# Altium PCB BG0250TG.PcbDoc
Units mil, origin at the board's own origin, x right, y up, seen from the top; angles counter-clockwise.
Board outline 984.25 x 939.45 mil, 4 copper layers (Top Layer, MidLayer 1, MidLayer 2, Bottom Layer), stack 61.723 mil thick; 48 components, 24 nets, 124 pads, 65 vias.
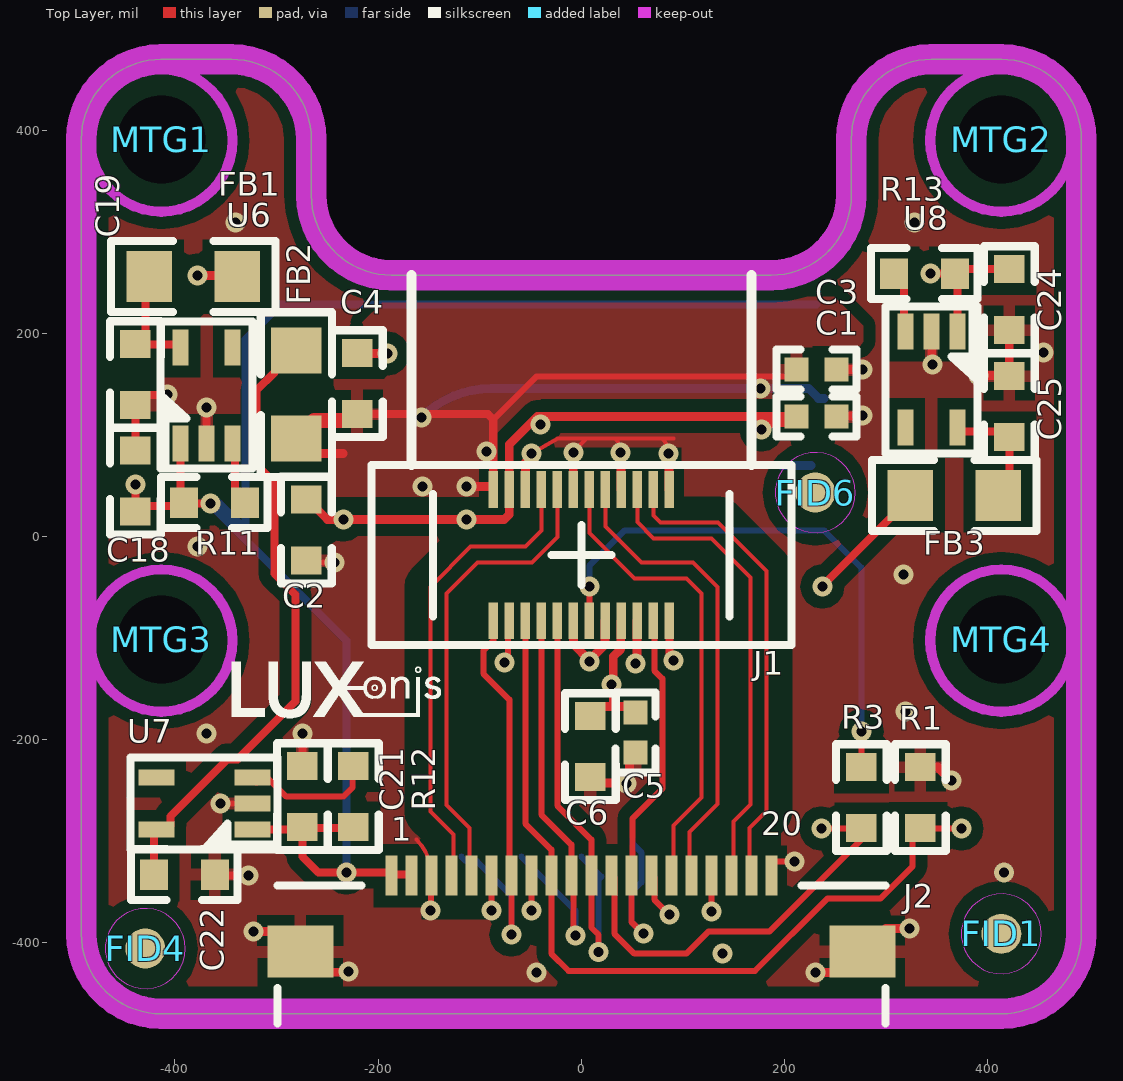
[diagram p0: Top Layer view]
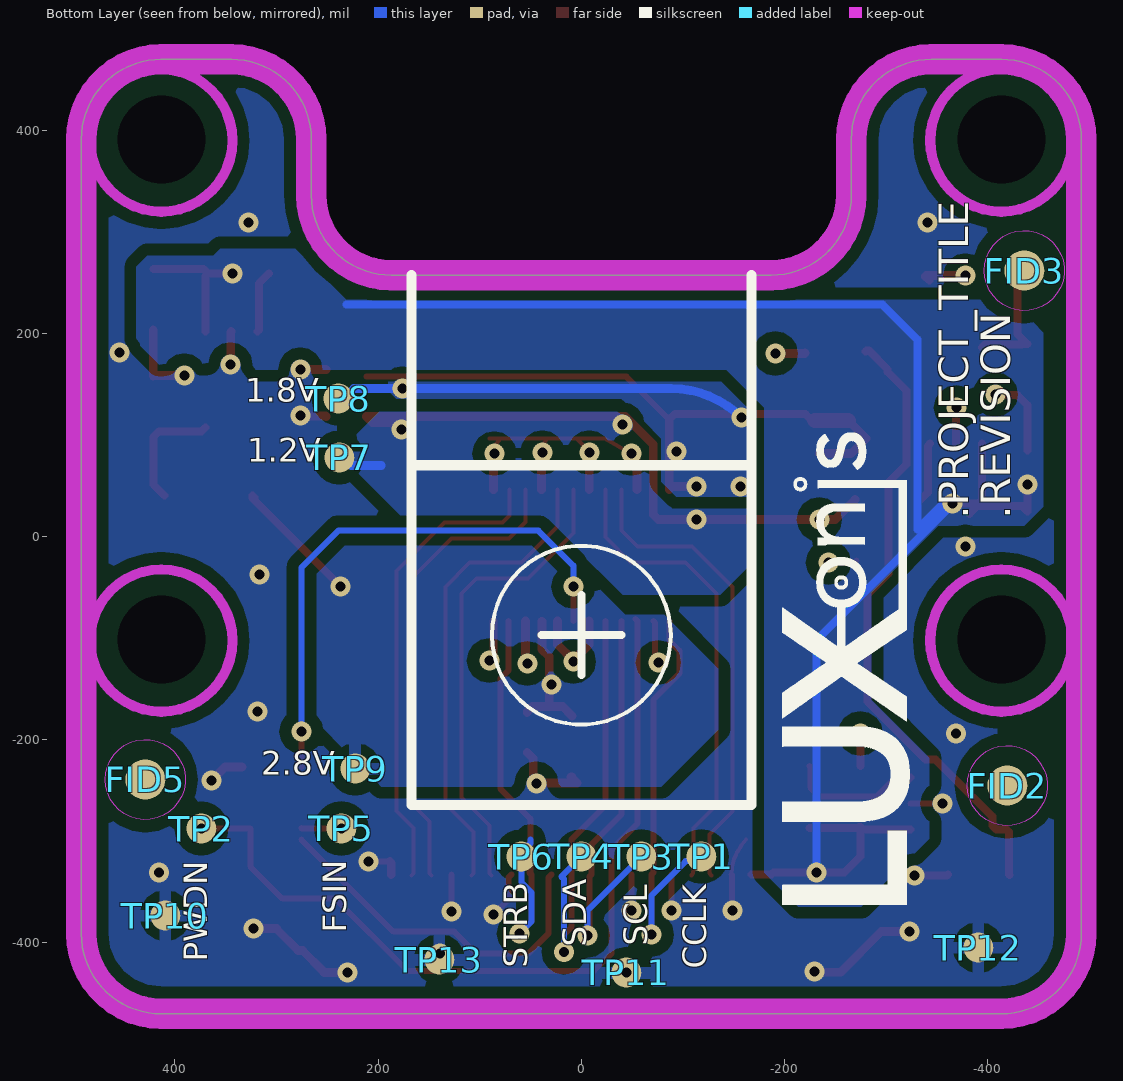
[diagram p1: Bottom Layer view, seen from below]
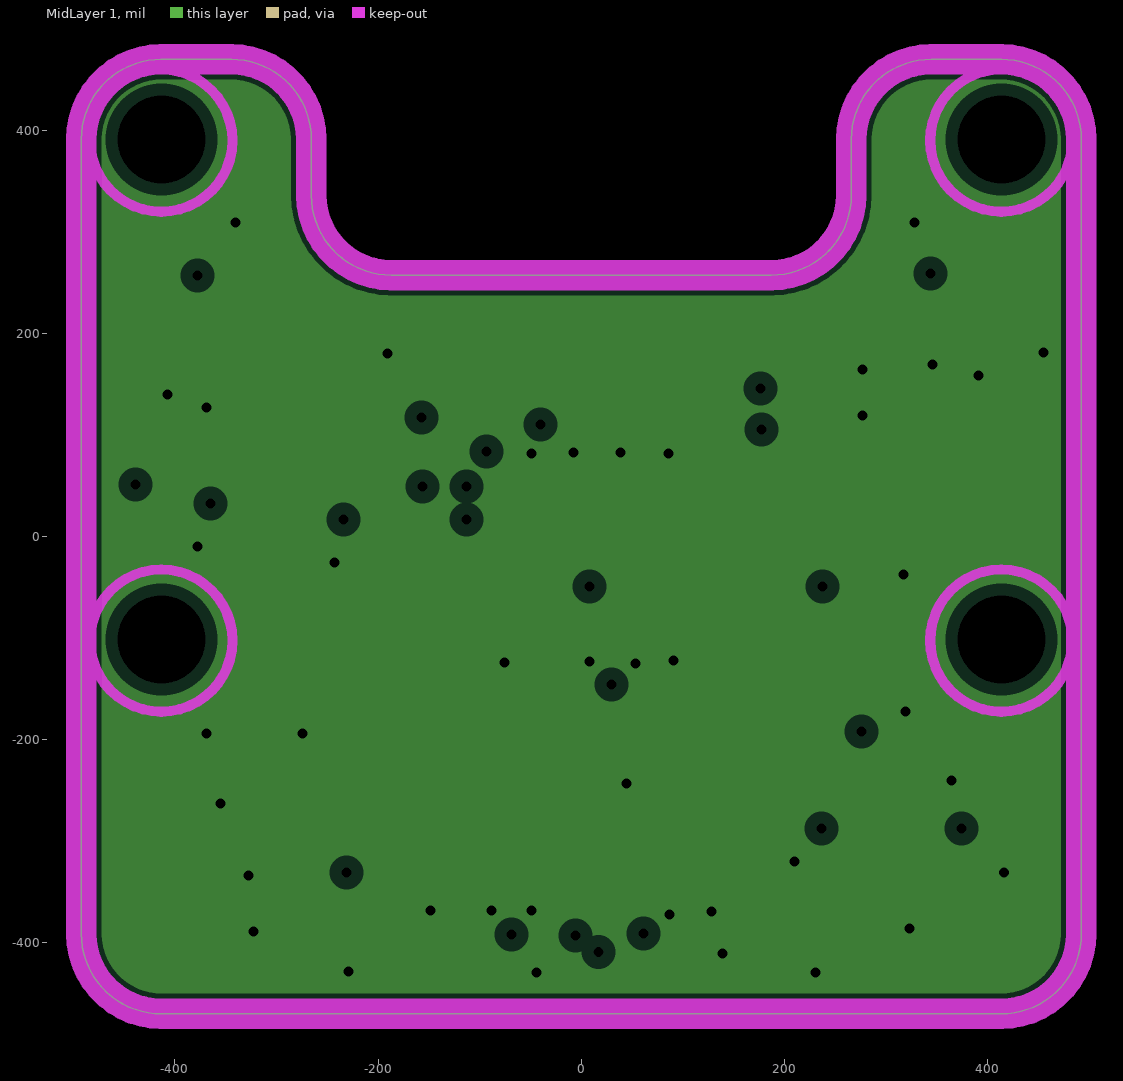
[diagram p2: MidLayer 1, clearances drawn from the general rule]
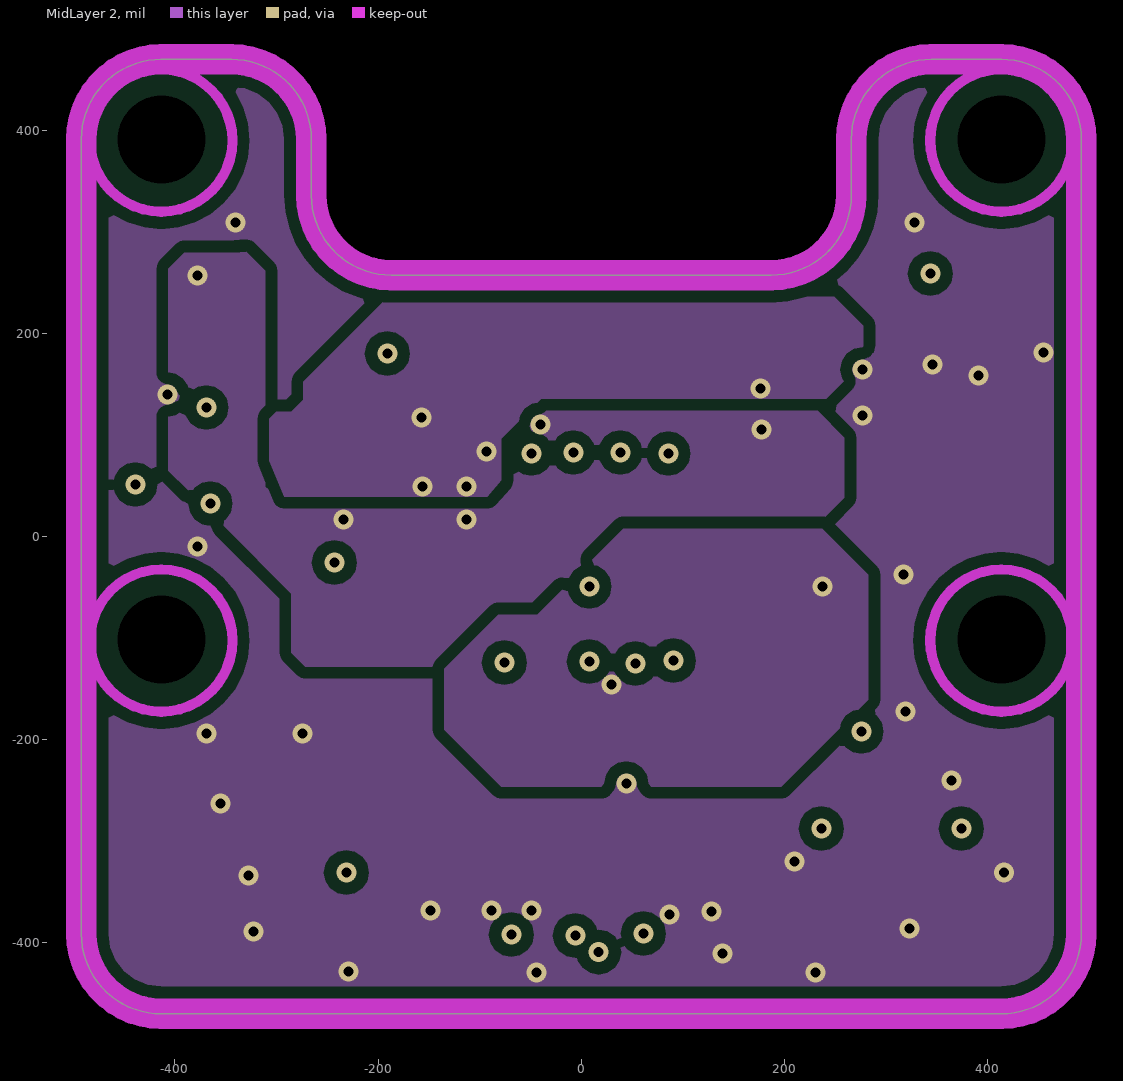
[diagram p3: MidLayer 2]

## Layer stack, top to bottom
Top Solder: solder mask 0.7874, Solder Resist, Dk 3.5
Top Layer: signal copper 1.3778
Dielectric1: prepreg 3.189, FR-4, Dk 4.3
MidLayer 1: plane copper 0.7, net GND
Dielectric3: core 51.1811, FR-4, Dk 4.3
MidLayer 2: signal copper 0.7087
Dielectric2: prepreg 3.189, FR-4, Dk 4.3
Bottom Layer: signal copper 1.3778
Bottom Solder: solder mask 0.7874, Solder Resist, Dk 3.5

## Board outline
-492.13,-390.98 ccw(c-413.39,-390.98) -413.39,-469.72 -413.39,-469.73 413.39,-469.73 413.39,-469.72 ccw(c413.39,-390.98) 492.13,-390.98 492.13,390.75 492.13,390.98 ccw(c413.39,390.98) 413.39,469.72 344.31,469.72 344.49,469.73 ccw(c344.49,390.98) 265.75,390.98 265.75,336.02 cw(c187.01,336.02) 187.01,257.28 -187.01,257.28 cw(c-187.01,336.02) -265.75,336.02 -265.75,390.98 ccw(c-344.49,390.98) -344.49,469.73 -344.31,469.72 -413.39,469.72 ccw(c-413.39,390.98) -492.13,390.98

## Design rules (kind name [scope] priority, off if disabled: settings)
AssemblyTestPointUsage [All] p1 off:
AssemblyTestpoint [All] p1 off: testpointundercomponent=TRUE minsize=40 maxsize=100 preferedsize=60 minholesize=0 maxholesize=40 preferedholesize=32 testpointgrid=1 usegrid=TRUE gridtolerance=0.01 allowsidetop=TRUE allowsidebottom=TRUE
Clearance Clearance_2 [InPolygon vs InNetClass('SENSOR1MIPI')] p1: gap=23.62 ignorepadtopadclearanceinfootprint=FALSE except(0: Arc-Hole Track-Hole SMDPad-Hole THPad-Hole Via-Hole Fill-Hole Poly-Hole Region-Hole Text-Hole; 7.87: Arc-Via Track-Via SMDPad-Via THPad-Via Via-Via Via-Fill Via-Poly Via-Region Via-Text)
Clearance Clearance_3 [InNamedPolygon('GND_L04_P018')] p2: gap=15.75 ignorepadtopadclearanceinfootprint=FALSE except(0: Arc-Hole Track-Hole SMDPad-Hole THPad-Hole Via-Hole Fill-Hole Poly-Hole Region-Hole Text-Hole)
Clearance Clearance_1 [InPolygon] p3: gap=11.81 ignorepadtopadclearanceinfootprint=FALSE except(0: Arc-Hole Track-Hole SMDPad-Hole THPad-Hole Via-Hole Fill-Hole Poly-Hole Region-Hole Text-Hole)
Clearance [All] p4: gap=3.94 ignorepadtopadclearanceinfootprint=FALSE except(0: Arc-Hole Track-Hole SMDPad-Hole THPad-Hole Via-Hole Fill-Hole Poly-Hole Region-Hole Text-Hole)
ComponentClearance [All] p1 off: gap=10 collisioncheckmode=3 verticalgap=10 showdistances=FALSE
DiffPairsRouting DiffPair_MIPI_1_DiffPairsRouting [InDifferentialPairClass('1MIPI')] p1: maxlimit=15.75 minlimit=10 mostfreqgap=11.81 toplayer_mingap=11.81 toplayer_minwidth=3.94 toplayer_maxwidth=3.94 toplayer_prefwidth=3.94 bottomlayer_mingap=11.81 bottomlayer_minwidth=3.94 bottomlayer_maxwidth=3.94 bottomlayer_prefwidth=3.94 impedanceprofiledriven=TRUE impedanceprofileid={84B90D63-6C53-4755-9BB4-0970869BF656} impedanceprofilevalue=100.000000 maxuncoupledlength=500
DiffPairsRouting DiffPair_MIPI_2_DiffPairsRouting [InDifferentialPairClass('2MIPI')] p2: maxlimit=15.75 minlimit=10 mostfreqgap=11.81 toplayer_mingap=11.81 toplayer_minwidth=3.94 toplayer_maxwidth=3.94 toplayer_prefwidth=3.94 bottomlayer_mingap=11.81 bottomlayer_minwidth=3.94 bottomlayer_maxwidth=3.94 bottomlayer_prefwidth=3.94 impedanceprofiledriven=TRUE impedanceprofileid={84B90D63-6C53-4755-9BB4-0970869BF656} impedanceprofilevalue=100.000000 maxuncoupledlength=500
DiffPairsRouting [All] p3: maxlimit=15.75 minlimit=10 mostfreqgap=11.81 toplayer_mingap=11.81 toplayer_minwidth=3.94 toplayer_maxwidth=3.94 toplayer_prefwidth=3.94 bottomlayer_mingap=11.81 bottomlayer_minwidth=3.94 bottomlayer_maxwidth=3.94 bottomlayer_prefwidth=3.94 impedanceprofiledriven=TRUE impedanceprofileid={84B90D63-6C53-4755-9BB4-0970869BF656} impedanceprofilevalue=100.000000 maxuncoupledlength=500
FabricationTestPointUsage [All] p1 off: valid=0 allowmultiple=FALSE
FabricationTestpoint [All] p1 off: side=3 testpointundercomponent=TRUE minsize=40 maxsize=100 preferedsize=60 minholesize=0 maxholesize=40 preferedholesize=32 testpointgrid=1 allowsidetop=TRUE allowsidebottom=TRUE usegrid=TRUE gridtolerance=0.01
FanoutControl Fanout_BGA [IsBGA] p1 off: bgadir=Out bgaviamode=Centered fanoutstyle=Auto fanoutdirection=Alternating viagrid=1 // Fanout_BGA (Default Rule)
FanoutControl Fanout_LCC [IsLCC] p2 off: bgadir=Out bgaviamode=Centered fanoutstyle=Auto fanoutdirection=Alternating viagrid=1 // Fanout_LCC (Default Rule)
FanoutControl Fanout_SOIC [IsSOIC] p3 off: bgadir=Out bgaviamode=Centered fanoutstyle=Auto fanoutdirection=Alternating viagrid=1 // Fanout_SOIC (Default Rule)
FanoutControl Fanout_Small [(CompPinCount < 5)] p4 off: bgadir=Out bgaviamode=Centered fanoutstyle=Auto fanoutdirection=OutThenIn viagrid=1 // Fanout_Small (Default Rule)
FanoutControl Fanout_Default [All] p5 off: bgadir=Out bgaviamode=Centered fanoutstyle=Auto fanoutdirection=Alternating viagrid=1 // Fanout_Default (Default Rule)
Height [All] p1 off: minheight=0 maxheight=1000 prefheight=500
HoleSize [All] p1 off: absolutevalues=TRUE maxlimit=100 minlimit=5.12 maxpercent=80.000 minpercent=20.000
HoleToHoleClearance [All] p1: gap=8.27 allowstackedmicrovias=TRUE
LayerPairs [All] p1 off: enforce=TRUE
Length "InNet('CAM1_C_P') Or InNet('CAM1_D1_P')" [InNet('CAM1_C_P') Or InNet('CAM1_D1_P')] p1: maxlimit=1609.53 minlimit=0
MatchedLengths MatchedLengths-1MIPI [InDifferentialPairClass('SENSOR1MIPI')] p1: tolerance=39.37 checknetsindiffpair=TRUE checkdiffpairvsdiffpair=FALSE checkxsignals=FALSE checkothers=FALSE
MatchedLengths MatchedLengths-2MIPI [InDifferentialPairClass('SENSOR2MIPI')] p2: tolerance=39.37 checknetsindiffpair=FALSE checkdiffpairvsdiffpair=TRUE checkxsignals=TRUE checkothers=TRUE
MatchedLengths DiffPair_MIPI_1_MatchedLengths [InDifferentialPairClass('SENSOR1MIPI')] p3: tolerance=27.56 checknetsindiffpair=FALSE checkdiffpairvsdiffpair=TRUE checkxsignals=TRUE checkothers=TRUE
MatchedLengths DiffPair_MIPI_2_MatchedLengths [InDifferentialPairClass('SENSOR2MIPI')] p4: tolerance=27.56 checknetsindiffpair=FALSE checkdiffpairvsdiffpair=TRUE checkxsignals=TRUE checkothers=TRUE
MinimumSolderMaskSliver [All] p1 off: minsoldermaskwidth=10
PasteMaskExpansion [All] p1 off: expansion=0
PlaneClearance [All] p1: clearance=11.81
PlaneConnect via [IsVia] p1: planeconnectstyle=Direct reliefexpansion=20 reliefentries=4 reliefconductorwidth=10 reliefairgap=10
PlaneConnect [All] p2: planeconnectstyle=Relief reliefexpansion=11.81 reliefentries=4 reliefconductorwidth=15.75 reliefairgap=11.81
PolygonConnect GND_VIA [isvia] p1: connectstyle=Direct reliefconductorwidth=10 reliefentries=4 polygonreliefangle="90 Angle" airgapwidth=10
PolygonConnect [All] p2: connectstyle=Relief reliefconductorwidth=11.81 reliefentries=4 polygonreliefangle="90 Angle" airgapwidth=10
RoutingCorners [All] p1 off: cornerstyle=45-Degree minsetback=100 maxsetback=100
RoutingPriority [All] p1 off: routingpriority=0
RoutingTopology [All] p1 off: topology=Shortest
RoutingVias [All] p1: holewidth=5.91 width=10.83 viastyle="Through Hole" minholewidth=5.12 minwidth=10.83 maxholewidth=15.75 maxwidth=31.5
SMDNeckDown [All] p1 off: percent=50.000
SilkToSilkClearance [All] p1 off: silktosilkclearance=10
SilkToSolderMaskClearance SilkscreenOverComponentPads [IsPad] p1 off: minsilkscreentomaskgap=10 clearancetoexposedcopper=TRUE
SolderMaskExpansion [All] p1 off: expansion=4
Width DiffPair_MIPI_1_Width [InDifferentialPairClass('1MIPI')] p1: maxlimit=6.3 minlimit=3.94 preferedwidth=6.3 toplayer_maxwidth=3.94 toplayer_prefwidth=3.94 midlayer1_minwidth=6.3 bottomlayer_maxwidth=3.94 bottomlayer_prefwidth=3.94 minimp=50.000000 maximp=50.000000 favimp=50.000000
Width DiffPair_MIPI_2_Width [InDifferentialPairClass('2MIPI')] p2: maxlimit=6.3 minlimit=3.94 preferedwidth=6.3 toplayer_maxwidth=3.94 toplayer_prefwidth=3.94 midlayer1_minwidth=6.3 bottomlayer_maxwidth=3.94 bottomlayer_prefwidth=3.94 minimp=50.000000 maximp=50.000000 favimp=50.000000
Width [All] p3: maxlimit=196.85 minlimit=3.94 preferedwidth=3.94 minimp=50.000000 maximp=50.000000 favimp=50.000000
6 further rules are at their usual default settings.

## Classes and differential pairs
net class SENSOR1MIPI: CAM1_C_N CAM1_C_P CAM1_D0_N CAM1_D0_P CAM1_D1_N CAM1_D1_P
component class Power: C18 C19 C21 C22 C24 C25 FB1 FB2 FB3 R11 R12 R13 TP7 TP8 TP9 TP10 TP11 TP12 TP13 U6 U7 U8
component class BG0250TG_BW235_OV_9282: C1 C2 C3 C4 C5 C6 FID1 FID2 FID3 FID4 FID5 FID6 J1 J2 MTG1 MTG2 MTG3 MTG4 R1 R3 TP1 TP2 TP3 TP4 TP5 TP6
differential pair CAM1_D1: +CAM1_D1_P -CAM1_D1_N
differential pair CAM1_D0: +CAM1_D0_P -CAM1_D0_N
differential pair CAM1_C: +CAM1_C_P -CAM1_C_N

## Components (designator, comment, footprint, x,y, rotation, side; value= is the part's Value field where it differs from the comment)
C1 "100nF" 0402 231.3,118.11 r180 top
C2 "10uF/6V" 0603 -270.67,6.42 r90 top
C3 "100nF" 0402 231.3,164.37 r180 top
C4 "10uF/6V" 0603 -220.47,150.59 r270 top
C5 "100nF" 0402 53.15,-192.91 r90 top
C6 "10uF/6V" 0603 8.86,-206.69 r90 top
C18 "10uF/10V" 0603 -438.98,54.65 r90 top
C19 "10uF/10V" 0603 -438.98,159.45 r270 top
C21 "10uF/10V" 0603 -274.61,-255.91 r90 top
C22 "10uF/10V" 0603 -390.75,-332.68 r0 top
C24 "10uF/10V" 0603 421.26,233.27 r270 top
C25 "10uF/10V" 0603 421.26,127.95 r90 top
FB1 "600R/100MHz" 0805 -381.89,255.91 r0 top
FB2 "600R/100MHz" 0805 -280.51,139.76 r270 top
FB3 "600R/100MHz" 0805 367.13,40.35 r180 top
FID1 "FID" FIDUCIAL_1MM 413.39,-390.98 r0 top
FID2 "FID" FIDUCIAL_1MM -419.29,-245.08 r90 bottom
FID3 "FID" FIDUCIAL_1MM -436.02,261.81 r90 bottom
FID4 "FID" FIDUCIAL_1MM -429.13,-405.51 r90 top
FID5 "FID" FIDUCIAL_1MM 429.13,-239.17 r90 bottom
FID6 "FID" FIDUCIAL_1MM 230.32,43.31 r90 top
J1 "TG161B-201" "TG161B-201 / AN01V32 - BOARD WRAP" 0,828.15 r0 top locked
J2 "54548-2071" 545482071 0,-343.5 r0 top locked
MTG1 "MTG-HOLE" Hole_2.2mm -413.39,390.98 r90 top locked
MTG2 "MTG-HOLE" Hole_2.2mm 413.39,390.98 r90 top locked
MTG3 "MTG-HOLE" Hole_2.2mm -413.39,-101.14 r90 top locked
MTG4 "MTG-HOLE" Hole_2.2mm 413.39,-101.14 r90 top locked
R1 "10K" 0603 333.66,-256.89 r90 top
R3 "0R" 0603 275.59,-256.89 r270 top
R11 "10K" 0603 -361.22,33.46 r0 top
R12 "10K" 0603 -224.41,-255.91 r90 top
R13 "10K" 0603 337.6,258.86 r180 top
TP1 "TP_SMD" TP_0.75MM_SMD_NO-SILK -118.11,-314.96 r180 bottom
TP2 "TP_SMD" TP_0.75MM_SMD_NO-SILK 374.02,-287.4 r90 bottom
TP3 "TP_SMD" TP_0.75MM_SMD_NO-SILK -59.06,-314.96 r90 bottom
TP4 "TP_SMD" TP_0.75MM_SMD_NO-SILK 0,-314.96 r90 bottom
TP5 "TP_SMD" TP_0.75MM_SMD_NO-SILK 236.22,-287.4 r90 bottom
TP6 "TP_SMD" TP_0.75MM_SMD_NO-SILK 59.06,-314.96 r90 bottom
TP7 "TP_SMD" TP_0.75MM_SMD_NO-SILK 238.19,77.76 r270 bottom
TP8 "TP_SMD" TP_0.75MM_SMD_NO-SILK 239.17,135.83 r180 bottom
TP9 "TP_SMD" TP_0.75MM_SMD_NO-SILK 222.44,-228.35 r180 bottom
TP10 "TP_SMD" TP_0.75MM_SMD_NO-SILK 409.45,-373.03 r90 bottom
TP11 "TP_SMD" TP_0.75MM_SMD_NO-SILK -44.29,-429.13 r90 bottom
TP12 "TP_SMD" TP_0.75MM_SMD_NO-SILK -390.75,-404.53 r90 bottom
TP13 "TP_SMD" TP_0.75MM_SMD_NO-SILK 139.76,-416.34 r90 bottom
U6 "TLV70012DCKT" SC70-5 -368.88,138.78 r0 top
U7 "TLV70018DCKT" SC70-5 -371.06,-262.8 r90 top
U8 "TLV70028DCKT" SC70-5 344.49,154.53 r180 top

## Footprints (in the part's own frame and the unit in brackets; to place one, negate y for a bottom-side part, rotate by r counter-clockwise, add the part's x,y. Pads: shape width x height; smd on the part's side, far side on the other; paste and mask are expansions set on the pad)
0402 [mm] "chip 0402"
  rect 0.6x0.6 smd mask+0.07: 1(-0.5,0) 2(0.5,0)
  silkscreen extent -1,-0.5 1,0.5, body extent -0.6,-0.28 0.6,0.28, height 0.4
0603 [mm] "chip 0603"
  rect 0.7x0.76 smd: 1(-0.762,0) 2(0.762,0)
  silkscreen extent -1.33,-0.63 1.33,0.64, body extent -0.8,-0.4 0.8,0.4, height 0.51
0805 [mil] "chip 0805"
  rect 45x50 smd: 1(-43.31,0) 2(43.31,0)
  silkscreen extent -81,-35 81,35, body extent -47,-26 47,26, height 20
545482071 [mm] "20pin Molex FFC 0.5mm"
  rect 0.3x1 smd: 1(-4.75,0.25) 2(-4.25,0.25) 3(-3.75,0.25) 4(-3.25,0.25) 5(-2.75,0.25) 6(-2.25,0.25) 7(-1.75,0.25) 8(-1.25,0.25) 9(-0.75,0.25) 10(-0.25,0.25) 11(0.25,0.25) 12(0.75,0.25) 13(1.25,0.25) 14(1.75,0.25) 15(2.25,0.25) 16(2.75,0.25) 17(3.25,0.25) 18(3.75,0.25) 19(4.25,0.25) 20(4.75,0.25)
  rect 1.65x1.3 smd: MP1(-7.025,-1.65) MP2(7.025,-1.65)
  silkscreen extent -7.6,-3.45 7.6,0, body extent -7.6,-4.55 7.6,0.45, height 1.18
FIDUCIAL_1MM [mm]
  round 1 smd paste-1 mask+0.5: 1(0,0)
  Top Layer keep-out circle w0.025: c0,0 r1
Hole_2.2mm [mil] "2.2mm Hole Used in Raspberry Pi Camera"
  round 60 hole 86.61 unplated: 1(0,0)
SC70-5 [mm]
  rect 0.4x0.9 smd mask+0.05: 1(-0.65,-1.2) 2(0,-1.2) 3(0.65,-1.2) 4(0.65,1.2) 5(-0.65,1.2)
  silkscreen extent -1.15,-1.83 1.15,1.85, body extent -1,-1.05 1,1.05, height 1.1
"TG161B-201 / AN01V32 - BOARD WRAP" [mm] "SMT connector: BBR43-24KB533"
  rect 0.23x0.92 smd mask+0.05: 1(-2.2,-19.86) 2(-1.8,-19.86) 3(-1.4,-19.86) 4(-1,-19.86) 5(-0.6,-19.86) 6(-0.2,-19.86) 7(0.2,-19.86) 8(0.6,-19.86) 9(1,-19.86) 10(1.4,-19.86) 11(1.8,-19.86) 12(2.2,-19.86) 13(2.2,-23.14) 14(1.8,-23.14) 15(1.4,-23.14) 16(1,-23.14) 17(0.6,-23.14) 18(0.2,-23.14) 19(-0.2,-23.14) 20(-0.6,-23.14) 21(-1,-23.14) 22(-1.4,-23.14) 23(-1.8,-23.14) 24(-2.2,-23.14)
  silkscreen extent -5.25,-23.75 5.25,-14.5, body extent -5.25,-27.75 5.25,-13.09, height 4.4
TP_0.75MM_SMD_NO-SILK [mm] "general purpose test point"
  round 0.75 smd paste-2: 1(0,0)

## Part data
C1 C3 C5: library part CAP, "SMD Multilayer Ceramic Capacitor, 0402 [1005 Metric], 0.1 µF, 10 V, ± 10%, X5R", DIST=Farnell, DIST PN=2392235, ICCO PN=MV122005, MAN=Kemet, MAN PN=C0402C104K8PACTU
C2 C4 C6 C18 C19 C21 C22 C24 C25: library part CAP, "CC0603MRX5R5BB106  SMD Multilayer Ceramic Capacitor, 0603 [1608 Metric], 10 µF, 6.3 V, ± 20%, X5R", DIST=Farnell, DIST PN=1458902, ICCO PN=MV122009, MAN=Yageo(PHYCOM), MAN PN=CC0603MRX5R5BB106
FB1 FB2 FB3: library part INDUCTANCE1, "Ferrite Bead", DIST=Farnell, DIST PN=1838838RL, ICCO PN=MV142024, MAN=FAIR-RITE, MAN PN=2508056017Y2
FID1 FID2 FID3 FID4 FID5 FID6: "Fiducial mark", MAN=Fiducial, MAN PN="No part on PCB"
J1: "24 way, 2row baord to board connector SMD", DIST=Sunny, DIST PN=BBR43-24KB533, ICCO PN=MV250003, MAN=ACON, MAN PN=BBR43-24KB533
J2: "FFC & FPC Connectors 0.5 FPC ZIF Hsg Assy ssy 22Ckt EmbsTp Pkg", Manufacturer_Name=Molex, Manufacturer_Part_Number=54548-2271, Mouser Part Number=538-54548-2271, Datasheet Link=http://www.molex.com/webdocs/datasheets/pdf/en-us//0545482271_FFC_FPC_CONNECTORS.pdf, Height=1mm, Mouser Price/Stock=https://www.mouser.com/Search/Refine.aspx?Keyword=538-54548-2271
MTG1 MTG2 MTG3 MTG4: "Mounting Hole"
R1 R11 R12 R13: library part RES1, "SMD Chip Resistor, 10 kohm, 75 V, 0603 [1608 Metric], 100 mW, ± 1%", DIST=Farnell, DIST PN=2502397, ICCO PN=MV122008, MAN=Walsin, MAN PN=WR06X1002FTL
R3: library part RES1, "SMD Chip Resistor, Thick Film, 0 ohm, 75 V, 0603 [1608 Metric], 100 mW", DIST=Farnell, DIST PN=2059527RL, ICCO PN=MV122003, MAN=Panasonic, MAN PN=ERJ3GEY0R00V
TP1 TP2 TP3 TP4 TP5 TP6 TP7 TP8 TP9 TP10 TP11 TP12 TP13: "circular pad test point, SMD"
U6: "LDO, 200MA, 1.2V, 5SC70", DIST=Farnell, DIST PN=2437498, ICCO PN=MV250001, MAN=TI, MAN PN=TLV70012DCKT
U7: "LDO, 200MA, 1.8V, 5SC70", DIST=Farnell, DIST PN=1778221, ICCO PN=MV198003, MAN=TI, MAN PN=TLV70018DCKT
U8: "LDO, 200MA, 2.8V, 5SC70", DIST=Farnell, DIST PN=1778222, ICCO PN=MV250002, MAN=TI, MAN PN=TLV70028DCKT

## Via types
v1: diameter 19.68, hole 9.84, Top Layer to Bottom Layer, tented both sides, 65 vias

## Nets (pads, with @x,y where several pads share a name; then routed paths per layer and width w, separated by ;. In a path a pad name is that pad's centre, name@x,y a point inside that pad or via, vN(x,y) a via of type N, cw(c..) or ccw(c..) an arc to the next point about the centre after c; other vN are vias at no path point)
1.2V: C1.2 C2.2 FB1.2 J1.2 TP7.1 | length 687.4
  Top Layer w5.91: C2.2 C2.2@-269.49,36.42
  Top Layer w7.87: FB1.2@-342.52,251.97 FB1.2
  Top Layer w8.66: v1(-377.95,256.89) -339.57,256.89 FB1.2 ; C2.2@-269.49,36.42 -249.8,16.73 v1(-234.25,16.73) v1(-113.19,16.73) -75.79,16.73 -70.87,21.65 J1.2 -70.87,90.55 -43.31,118.11 C1.2 205.48,111.98 186.81,111.98 180.15,105.32 v1(177.17,105.32)
  Bottom Layer w8.66: 196.85,69.88 TP7.1@226.38,69.88
  other v1: -40.35,110.24
1.8V: C3.2 C4.2 FB2.2 J1.1 TP8.1 | length 1071.7
  Top Layer w5.91: -86.61,115.16 -44.29,157.48 C3.2@211.61,157.48
  Top Layer w7.87: C4.2@-224.41,116.65 C4.2 -92.05,120.59 -86.61,115.16
  Top Layer w8.66: FB2.2@-262.8,114.17 FB2.2 -265.75,81.69 -234.25,81.69 ; v1(-113.19,49.21) -86.81,49.21 J1.1@-86.61,49.02 ; J1.1 J1.1@-86.61,49.02 ; -86.61,115.16 J1.1@-86.61,49.02
  Top Layer w15: FB2.2@-262.8,114.17 C4.2@-229.84,114.17
  Bottom Layer w8.66: v1(-157.48,117.13) cw(c-88.57,48.22) -88.57,145.67 v1(176.18,145.67) 223.68,145.67 233.53,135.83 TP8.1
  other v1: -156.5,49.21 -93.5,83.66
2.8V: C5.2 C6.2 FB3.2 J1.16 TP9.1 | length 267.9
  Top Layer w7.87: J1.16@38.78,-83.46 J1.16 ; v1(237.2,-49.21) 237.2,-48.76 323.82,37.85 FB3.2 FB3.2@321.85,38.39
  Top Layer w8.66: C6.2 18.31,-167.24 29.61,-167.24 ; J1.16@38.78,-83.46 38.78,-110.83 31.5,-118.11 31.5,-165.35 29.61,-167.24 ; C5.2 53.15,-172.24 48.15,-167.24 29.61,-167.24
  other v1: 29.53,-145.67
CAM1_C_N: J1.11 J2.19 | length 467
  Top Layer w3.94: J1.11 70.87,20.67 77.76,13.78 134.52,13.78 182.09,-33.79 182.09,-270.3 165.35,-287.03 165.35,-331.69 J2.19
CAM1_C_P: J1.10 J2.18 | length 467
  Top Layer w3.94: J1.10 55.12,14.15 71.23,-1.97 127.99,-1.97 166.34,-40.31 166.34,-263.78 149.61,-280.51 149.61,-331.69 J2.18
CAM1_D0_N: J1.8 J2.16 | length 467.6
  Top Layer w3.94: J1.8 23.62,9.84 59.06,-25.59 109.87,-25.59 133.86,-49.58 133.86,-263.41 106.3,-290.97 106.3,-331.69 J2.16
CAM1_D0_P: J1.7 J2.15 | length 467.6
  Top Layer w3.94: J1.7 7.87,3.32 52.53,-41.34 103.35,-41.34 118.11,-56.1 118.11,-256.89 90.55,-284.45 90.55,-331.69 J2.15
CAM1_D1_N: J1.5 J2.5 | length 466.6
  Top Layer w3.94: J2.5 cw(c-103.52,-328.91) -110.24,-328.91 -110.24,-286.78 -132.87,-264.15 -132.87,-56.1 -102.36,-25.59 -48.6,-25.59 -23.62,-0.62 J1.5
CAM1_D1_P: J1.4 J2.4 | length 466.6
  Top Layer w3.94: J2.4 ccw(c-132.7,-328.91) -125.98,-328.91 -125.98,-293.31 -148.62,-270.67 -148.62,-49.58 -108.89,-9.84 -55.12,-9.84 -39.37,5.91 J1.4
CAM_CLK: J1.24 J2.7 TP1.1 | length 427.8
  Top Layer w5.91: J1.24 -86.61,-102.36 -96.46,-112.2 -96.46,-134.84 -70.87,-160.43 -70.87,-330.71 -68.9,-332.68 v1(-68.9,-391.73)
  Bottom Layer w5.91: TP1.1 -113.59,-319.48 -102.76,-319.48 -68.9,-353.35 v1(-68.9,-391.73)
CAM_PWDN: J1.22 J2.9 R1.1 TP2.1 | length 831
  Top Layer w5.91: J1.22@-53.54,-81.3 J1.22 -55.12,-282.48 -29.53,-308.07 -29.53,-410.43 -12.37,-427.59 170.84,-427.59 242.13,-356.3 294.29,-356.3 325.79,-324.8 325.79,-287.4 v1(374.02,-287.4)
FSIN: J2.12 R3.2 TP5.1 | length 396.6
  Top Layer w5.91: J2.12@29.53,-332.68 32.48,-335.63 32.48,-356.3 32.48,-390.75 52.17,-410.43 103.35,-410.43 125,-388.78 185.04,-388.78 R3.2@275.59,-298.23 ; v1(236.22,-287.4) 275.08,-287.4 R3.2
GND: C1.1 C2.1 C3.1 C4.1 C5.1 C6.1 C18.2 C19.2 C21.2 C22.2 C24.2 C25.2 J1.3 J1.6 J1.9 J1.12 J1.13 J1.15 J1.17 J1.19 J1.23 J2.3 J2.6 J2.8 J2.14 J2.17 J2.20 J2.MP1 J2.MP2 R1.2 TP10.1 TP11.1 TP12.1 TP13.1 U6.2 U7.2 U8.2 | length 1598.8
  Top Layer w3.94: -162.25,-298.38 cw(c-197.54,-333.66) -147.65,-332.69 cw(c-197.54,-333.66) J2.3 ; v1(-49.21,81.69) -23.62,96.46 4.92,96.46 ; v1(-7.87,82.68) cw(c-5.5,82.68) -7.18,84.36 4.92,96.46 ; v1(38.39,82.68) 38.39,84.58 ccw(c21.58,84.58) 33.46,96.46 ; v1(85.63,81.69) 85.63,82.2 ccw(c65.47,82.2) 79.72,96.46 ; 90.55,96.46 79.72,96.46 ; 4.92,96.46 33.46,96.46 ; 33.46,96.46 79.72,96.46
  Top Layer w5.91: v1(-355.31,-262.8) U7.2 ; C2.1 -268.66,-25.59 v1(-243.11,-25.59) ; v1(-148.62,-368.11) -148.13,-367.62 -148.13,-333.17 J2.3@-147.65,-332.69 ; v1(-88.58,-368.11) J2.6@-88.58,-332.68 ; v1@-73.82,-124.02 -72.34,-122.54 -72.34,-84.35 J1.23 ; v1(-49.21,-368.11) J2.8@-49.21,-332.68 ; J2.14@68.9,-332.68 71.85,-335.63 71.85,-357.28 v1(86.61,-372.05) ; v1(127.95,-369.09) J2.17@127.95,-332.68 ; J2.20@188.58,-319.88 v1(209.65,-319.88)
  Top Layer w7.87: C18.2 C19.2 -429.13,139.29 -407.95,139.29 v1(-407.48,139.76) ; v1(-369.09,126.97) -368.99,126.86 -368.99,91.64 U6.2 ; C22.2 -359.76,-333.66 v1(-327.76,-333.66) ; C21.2 v1(-274.61,-193.9) ; J1.13 86.61,-114.91 90.55,-118.85 v1(90.55,-122.05)
  Top Layer w8.66: v1(-322.83,-388.78) -295.28,-388.78 -255.31,-428.74 -229.92,-428.74 v1(-229.33,-428.15) ; C4.1 -220,180.12 v1(-190.94,180.12) ; J1.3 -54.92,46.46 -54.92,73 -49.21,78.71 v1(-49.21,81.69) ; J1.19 -7.68,-83.07 -7.68,-106.29 v1@7.87,-121.84 ; J1.6 v1(-7.87,82.68) ; v1(7.87,-123.03) v1@7.87,-121.84 ; C6.1 10.04,-236.69 4.11,-242.62 v1@43.8,-242.62 ; J1.17 23.43,-83.07 23.43,-106.29 v1@7.87,-121.84 ; v1(38.39,82.68) 39.17,81.89 39.17,46.46 J1.9 ; v1(44.29,-243.11) 43.31,-242.13 41.34,-242.13 47.36,-236.1 47.36,-218.39 C5.1 ; v1(53.15,-125) 54.92,-123.23 54.92,-83.07 J1.15 ; v1(85.63,81.69) 86.42,80.91 86.42,46.46 J1.12 ; J2.20@187.01,-332.68 187.01,-321.46 J2.20@188.58,-319.88 ; v1(230.32,-429.13) 253.15,-429.13 253.15,-428.74 274.41,-407.48 278.74,-407.48 300,-386.22 300,-385.83 v1(322.83,-385.83) ; C1.1 251.48,118.6 276.08,118.6 v1(276.57,119.09) ; C3.1 v1(276.57,164.37) ; R1.2 350.91,-226.89 v1(364.17,-240.16) ; U8.2 344.98,201.28 344.98,169.78 v1(345.47,169.29) ; v1(390.75,158.46) 420.75,158.46 C25.2 C24.2
  other v1: -44.29,-429.13 138.86,-410.43 415.87,-330.71 -368.88,-193.9 318.9,-172.24 -75.79,-124.02 316.93,-37.4 -377.95,-9.84 454.72,181.1 -340.55,309.06 327.76,309.06
I2C_SCL: J1.21 J2.10 TP3.1 | length 423.5
  Top Layer w5.91: J1.21 -39.37,-273.62 -9.84,-303.15 -9.84,-332.68 -7.87,-334.65 -7.87,-390.75 v1(-5.91,-392.72)
  Bottom Layer w5.91: TP3.1 -5.91,-368.11 v1(-5.91,-392.72)
I2C_SDA: J1.20 J2.11 TP4.1 | length 446.2
  Top Layer w5.91: J1.20 -23.62,-264.76 9.84,-298.23 9.84,-384.8 17.05,-392.01 v1(17.05,-408.97)
  Bottom Layer w5.91: TP4.1 19.69,-334.65 17.05,-337.28 v1(17.05,-408.97)
NetC19_1: C19.1 FB1.1 U6.5 | length 118.1
  Top Layer w7.87: FB1.1 -429.13,251.97 -429.13,199.29 -436.26,192.17 C19.1 -433.54,189.45 -433.07,188.98 -397.42,188.98 U6.5
NetC22_1: C22.1 FB2.1 U7.5 | length 620.7
  Top Layer w7.87: C22.1@-421.26,-333.19 C22.1 -420.75,-290.83 U7.5 -408.46,-288.39 -404.53,-284.45 -404.53,-275.59 -348.43,-219.49 -338.58,-219.49 -281.5,-162.4 -281.5,-57.09 -302.17,-36.42 -302.17,53.15 -319.88,70.87 -319.88,143.7 -301.57,162.01 -301.57,164.51 -283.01,183.07 FB2.1 FB2.1@-279.53,182.09
NetC25_1: C25.1 FB3.1 U8.5 | length 117.1
  Top Layer w7.87: U8.5 374.02,103.35 415.87,103.35 C25.1 421.26,51.18 FB3.1
NetJ1_18: J1.18 R3.1 | length 547.8
  Top Layer w5.91: J1.18 v1(7.87,-49.21) ; R3.1 v1(275.59,-191.93)
  Bottom Layer w5.91: v1(7.87,-49.21) 7.87,-28.54 42.32,5.91 239.17,5.91 275.59,-30.51 v1(275.59,-191.93)
NetR11_2: R11.2 U6.3 | length 63.1
  Top Layer w7.87: U6.3 -341.06,89.31 -341.06,43.31 R11.2
NetR12_2: R12.2 U7.3 | length 127.1
  Top Layer w5.91: U7.3@-313.98,-238.19 U7.3@-309.06,-238.19 ; U7.3@-309.06,-237.2 -290.35,-255.91 -234.25,-255.91 -225.39,-247.05 -225.39,-226.89 R12.2
  Top Layer w7.87: U7.3 U7.3@-319.88,-241.14
NetR13_2: R13.2 U8.3 | length 61.8
  Top Layer w7.87: R13.2 317.44,249.02 317.44,203.23 U8.3
STROBE: J1.14 J2.13 TP6.1 | length 434.6
  Top Layer w5.91: v1(61.02,-390.75) 49.21,-378.94 49.21,-332.68 51.18,-330.71 50.2,-329.72 50.2,-277.56 79.72,-248.03 79.72,-139.76 71.85,-131.89 J1.14@71.85,-82.87
  Bottom Layer w5.91: 50.2,-298.23 50.2,-301.96 59.06,-310.82 TP6.1 59.06,-340.3 49.21,-350.14 49.21,-378.94 v1(61.02,-390.75)
VDD_5V: C18.1 C21.1 C24.1 J2.1 J2.2 R11.1 R12.1 R13.1 U6.1 U7.1 U8.1 | length 1789.1
  Top Layer w7.87: v1(-438.98,51.18) C18.1 -433.5,30.12 R11.1@-401.06,30.12 ; U6.1 -394.47,36.71 R11.1@-401.06,30.12 ; R11.1 -390.24,32.48 v1@-366.14,32.48 ; R11.1@-382.09,22.44 -389.76,30.12 R11.1@-401.06,30.12 ; U7.1 -277.09,-288.39 C21.1 ; R12.1@-224.41,-286.89 -272.44,-286.89 -273.43,-285.91 C21.1 ; J2.2@-167.32,-332.68 -187.01,-332.68 -188.98,-330.71 v1(-231.3,-330.71) -258.86,-330.71 -274.61,-314.96 C21.1 ; v1(343.5,258.86) R13.1 ; U8.1 370.08,256.38 R13.1 ; C24.1 372.01,263.27 R13.1
  Bottom Layer w7.87: v1(-231.3,-330.71) -231.3,-102.36 -366.14,32.48 -356.3,32.48 -330.71,6.89 -330.71,193.9 -296.26,228.35 231.3,228.35
  other v1: -365.16,32.48
pads on no net: FID1.1 FID2.1 FID3.1 FID4.1 FID5.1 FID6.1 MTG1.1 MTG2.1 MTG3.1 MTG4.1 U6.4 U7.4 U8.4

## Polygon pours and split planes (outlines as drawn)
GND on MidLayer 2 "MLGNDBRD" (solid, remove dead copper, pour order 45): 412.4,-449.8 ccw(c412.4,-389.76) 472.44,-389.76 472.44,389.76 ccw(c412.4,389.76) 412.4,449.8 344.49,449.8 ccw(c344.49,390.75) 285.43,390.75 285.43,335.63 cw(c187.01,335.63) 187.01,237.2 -187.01,237.2 cw(c-187.01,335.63) -285.43,335.63 -285.43,390.75 ccw(c-344.49,390.75) -344.49,449.8 -413.39,449.8 ccw(c-413.39,390.75) -472.44,390.75 -472.44,-390.75 ccw(c-413.39,-390.75) -413.39,-449.8
1.2V on MidLayer 2 "MLGNDBRD" (solid, pour order 37): -341.54,279.53 -390.75,279.53 -406.5,263.78 -406.5,64.96 -285.43,-56.1 -285.43,-114.17 -271.65,-127.95 -213.58,-127.95 -135.83,-127.95 -135.83,-125 -83.66,-72.83 -44.29,-72.83 40.35,11.81 232.28,11.81 258.86,38.39 258.86,97.44 224.41,131.89 -36.42,131.89 -76.77,91.54 -77.76,91.54 -77.76,49.21 -90.55,36.42 -298.23,36.42 -311.02,49.21 -311.02,261.81 -329.72,280.51
2.8V on MidLayer 2 "MLGNDBRD" (solid, pour order 23): -81.69,-76.77 -134.84,-129.92 -134.84,-189.96 -78.74,-246.06 196.85,-246.06 282.48,-160.43 282.48,-37.4 237.2,7.87 41.34,7.87 -43.31,-76.77
1.8V on MidLayer 2 "MLGNDBRD" (solid, pour order 13): -292.28,39.37 -307.09,74.8 -307.09,116.14 -300.2,123.03 -285.43,123.03 -273.62,134.84 -273.62,152.56 -189.96,236.22 249.02,236.22 277.56,207.68 277.56,172.24 241.14,135.83 -39.37,135.83 -78.74,96.46 -78.74,55.2 -92.68,39.37
GND on Bottom Layer "MLGNDBRD" (solid, pour order 47): 412.4,-449.8 ccw(c412.4,-389.76) 472.44,-389.76 472.44,389.76 ccw(c412.4,389.76) 412.4,449.8 344.49,449.8 ccw(c344.49,390.75) 285.43,390.75 285.43,335.63 cw(c187.01,335.63) 187.01,237.2 -187.01,237.2 cw(c-187.01,335.63) -285.43,335.63 -285.43,390.75 ccw(c-344.49,390.75) -344.49,449.8 -413.39,449.8 ccw(c-413.39,390.75) -472.44,390.75 -472.44,-390.75 ccw(c-413.39,-390.75) -413.39,-449.8
1.8V on Bottom Layer "MLGNDBRD" (solid, remove dead copper, pour order 31): -177.17,39.37 -177.17,125.98 -141.73,161.42 183.07,161.42 189.96,154.53 189.96,143.7 182.09,135.83 -39.37,135.83 -78.74,96.46 -78.74,54.13 -93.5,39.37
1.2V on Bottom Layer "MLGNDBRD" (solid, pour order 39): -170.28,27.56 -170.28,-23.62 -136.81,-57.09 -40.35,-57.09 35.43,18.7 176.18,18.7 225.39,67.91 225.39,96.46 198.82,123.03 -43.31,123.03 -73.82,92.52 -74.8,92.52 -74.8,42.32 -89.57,27.56
VDD_5V on Bottom Layer "MLGNDBRD" (solid, pour order 29): -275.59,-364.17 -342.52,-297.24 -342.52,-217.52 -285.43,-160.43 -285.43,-55.12 -351.38,10.83 -436.02,10.83 -454.72,29.53 -454.72,200.79 -422.24,233.27 231.3,233.27 281.5,283.46 355.31,283.47 362.2,276.57 427.17,276.57 437.99,265.75 437.99,191.93 410.43,164.37 -142.72,164.37 -180.12,126.97 -180.12,-330.71 -213.58,-364.17
2.8V on Bottom Layer "MLGNDBRD" (solid, pour order 25): -81.69,-76.77 -134.84,-129.92 -134.84,-189.96 -78.74,-246.06 196.85,-246.06 282.48,-160.43 282.48,-37.4 237.2,7.87 41.34,7.87 -43.31,-76.77
GND on Top Layer "MLGNDBRD" (solid, remove dead copper, pour order 43): 412.4,-449.8 ccw(c412.4,-389.76) 472.44,-389.76 472.44,389.76 ccw(c412.4,389.76) 412.4,449.8 344.49,449.8 ccw(c344.49,390.75) 285.43,390.75 285.43,335.63 cw(c187.01,335.63) 187.01,237.2 -187.01,237.2 cw(c-187.01,335.63) -285.43,335.63 -285.43,390.75 ccw(c-344.49,390.75) -344.49,449.8 -413.39,449.8 ccw(c-413.39,390.75) -472.44,390.75 -472.44,-390.75 ccw(c-413.39,-390.75) -413.39,-449.8
no net on Top Layer "MLGNDBRD" (solid, pour order 41): 305.12,-442.91
1.8V on Top Layer "MLGNDBRD" (solid, pour order 15): -291.23,39.37 -307.09,74.8 -307.09,116.14 -300.2,123.03 -285.43,123.03 -273.62,134.84 -273.62,152.56 -189.96,236.22 249.02,236.22 277.56,207.68 277.56,172.24 241.14,135.83 -39.37,135.83 -78.74,96.46 -78.74,68.9 -81.9,39.37
GND on MidLayer 1 (split plane): 157 vertices, not listed, extent -472.09,-449.68 472.09,449.68

## Keep-outs
Keep-Out Layer:
  circle w10: c413.39,389.76 r70
  circle w10: c-413.39,-102.36 r70
  circle w10: c-413.39,389.76 r70
  circle w10: c413.39,-102.36 r70
  lines w30: -344.49,469.73 cw(c-344.49,390.98) -265.75,390.98 -265.75,336.02 ccw(c-187.01,336.02) -187.01,257.28 187.01,257.28 ccw(c187.01,336.02) 265.75,336.02 265.75,390.98 cw(c344.49,390.98) 344.49,469.73 ; -344.31,469.72 -413.39,469.72 ccw(c-413.39,390.98) -492.13,390.98 -492.13,-390.98 ccw(c-413.39,-390.98) -413.39,-469.72 413.39,-469.73 ccw(c413.39,-390.98) 492.13,-390.98 492.13,390.75 ; 344.31,469.72 413.39,469.72 cw(c413.39,390.98) 492.13,390.98

## Other copper
Top Layer:
  region net I2C_SDA: 13.78,-356.3

## Silkscreen, mask and mechanical layers (free items; w line width, h text height)
Top Overlay:
  drawing of 7 lines, arcs and shapes, not listed
Bottom Overlay:
  drawing of 8 lines, arcs and shapes, not listed
  text "1.8V" at 330.71,125 h40
  text "1.2V" at 328.74,65.94 h40
  text ".REVISION" at -432.09,17.72 h50 r270
  text ".PROJECT_TITLE" at -390.75,17.72 h50 r270
  text "2.8V" at 314.96,-242.13 h40
  text "FSIN" at 223.43,-389.76 h40 r270
  text "SCL" at -72.83,-402.56 h40 r270
  text "SDA" at -12.8,-403.54 h40 r270
  text "PWDN" at 360.24,-418.31 h40 r270
  text "CCLK" at -130.91,-425.2 h40 r270
  text "STRB" at 45.28,-424.21 h40 r270
Board:
  lines w0.98: -413.39,469.72 -344.31,469.72 ; -265.75,336.02 -265.75,390.98 ; -187.01,257.28 187.01,257.28 ; 265.75,336.02 265.75,390.98 ; 344.31,469.72 413.39,469.72
  lines w1: -413.39,469.72 ccw(c-413.39,390.98) -492.13,390.98 -492.13,-390.98 ccw(c-413.39,-390.98) -413.39,-469.72 413.39,-469.73 ccw(c413.39,-390.98) 492.13,-390.98 492.13,390.75 ; -344.49,469.73 cw(c-344.49,390.98) -265.75,390.98 ; -265.75,336.02 ccw(c-187.01,336.02) -187.01,257.28 ; 187.01,257.28 ccw(c187.01,336.02) 265.75,336.02 ; 265.75,390.98 cw(c344.49,390.98) 344.49,469.73 ; 413.39,469.72 cw(c413.39,390.98) 492.13,390.98

## Text inside footprints (layer, text, board x,y; h text height)
J2: Top Overlay "20" at 177.17,-301.96 h39.37; Top Overlay "1" at -187.01,-307.09 h39.37